# EAGLE board eTapper1main18 (EAGLE 8.2.2)
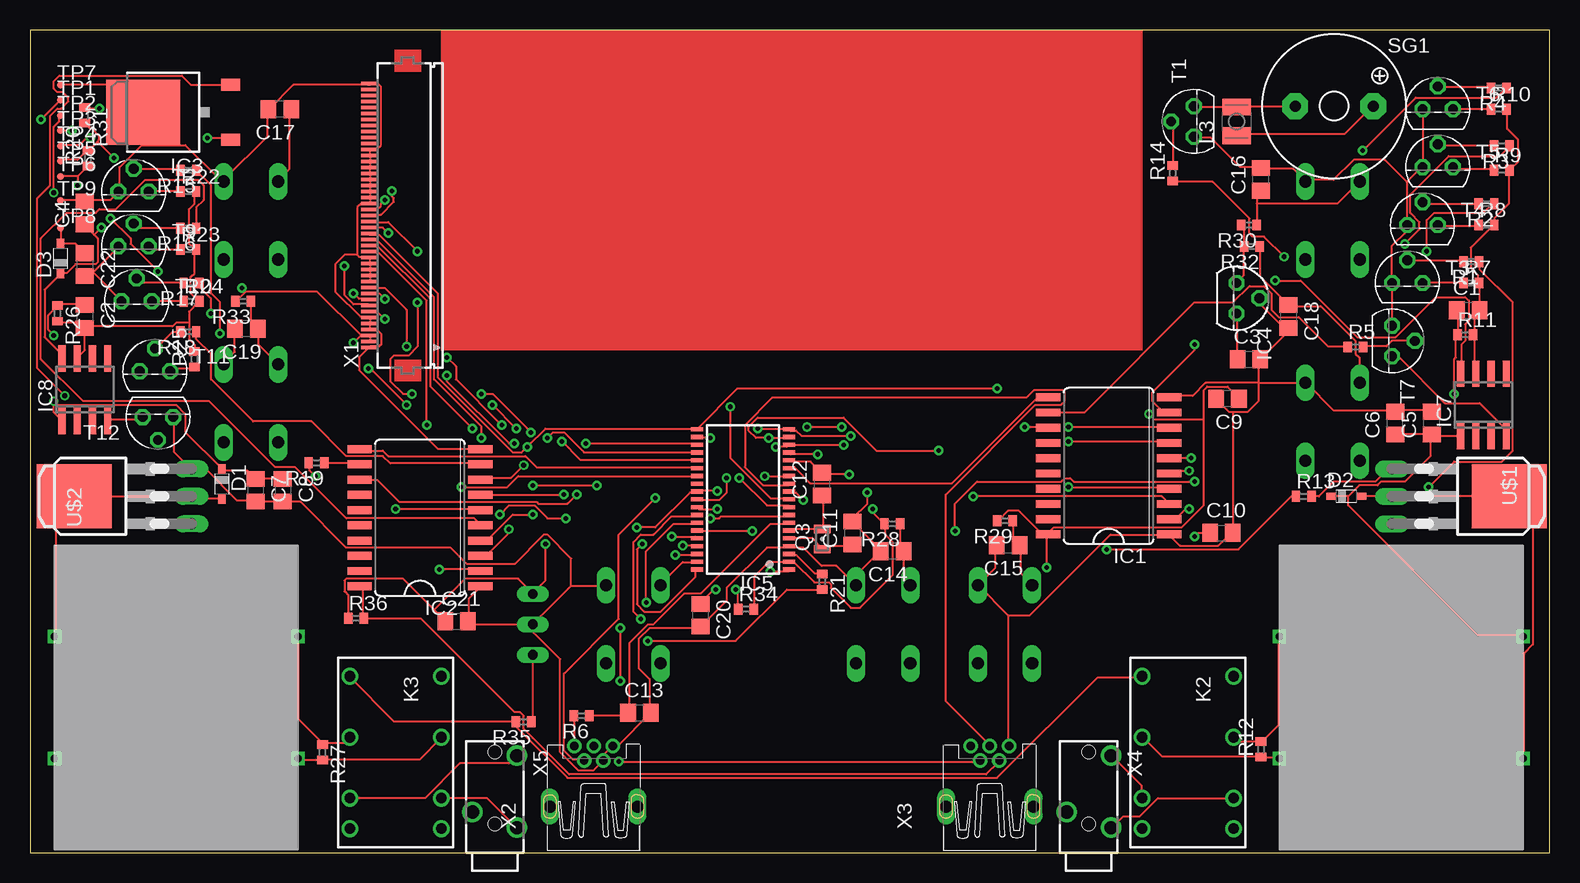
[diagram p0: board, top side]
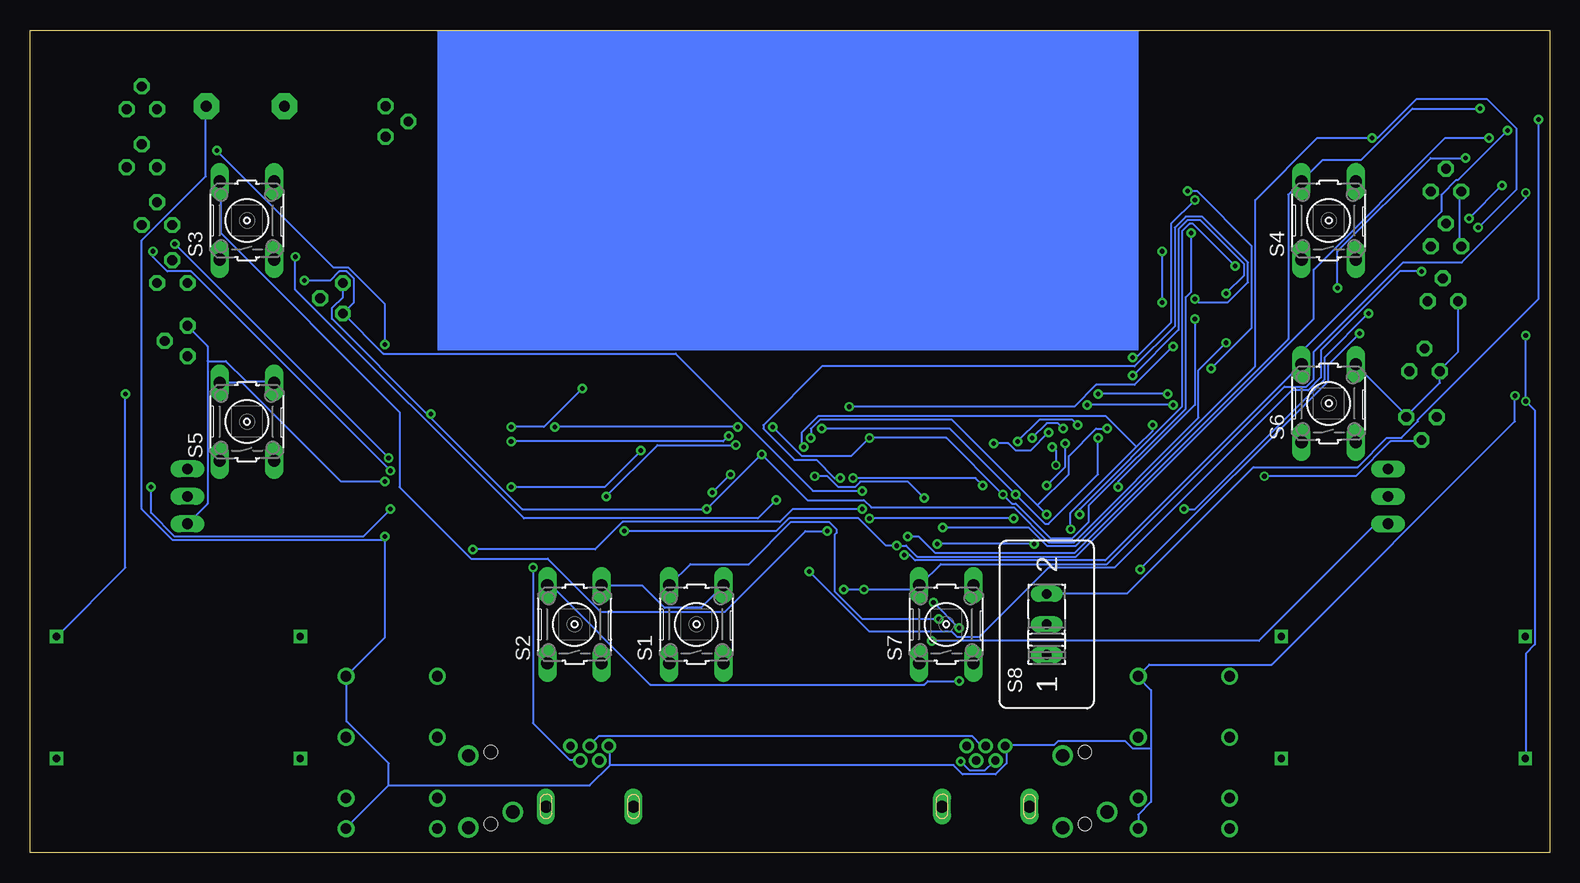
[diagram p1: board, bottom side, seen from below]

Size 126.67 x 68.57 mm. Coordinates in mm from the lower left corner, seen from the top.
Outline: 0,0 126.67,0 126.67,68.57 0,68.57 0,0
Copper layers (1*16): Top 0.035mm / dielectric 1.5mm / Bottom 0.035mm
Design rules "default *": minimum track width 6mil, minimum drill 15mil, track to track 6mil, track to pad 6mil, pad to pad 6mil, via to via 6mil, smd to smd 6mil, copper to edge 10mil, drill to drill 10mil, minimum pad ring 10mil, minimum via ring 8mil, stop-mask expansion 4mil, vias tented up to drill 0mil, thermal gap 15mil

## Footprints (pad centres in the part's own frame; a part is rotated, then mirrored left to right if it is on the bottom)
C0805 = smd 1.3 x 1.5: 1 -0.95,0; 2 0.95,0
SOD323_ST = smd 0.8 x 0.6: A 1.25,0; C -1.25,0
SO20W = smd 0.66 x 2.032: 1 -5.715,-5.029; 2 -4.445,-5.029; 3 -3.175,-5.029; 4 -1.905,-5.029; 5 -0.635,-5.029; 6 0.635,-5.029; 7 1.905,-5.029; 8 3.175,-5.029; 9 4.445,-5.029; 10 5.715,-5.029; 11 5.715,5.029; 12 4.445,5.029; 13 3.175,5.029; 14 1.905,5.029; 15 0.635,5.029; 16 -0.635,5.029; 17 -1.905,5.029; 18 -3.175,5.029; 19 -4.445,5.029; 20 -5.715,5.029
TO252 = smd 1 x 1.6: 1 -2.28,-4.8; 3 2.28,-4.8 | smd 5.4 x 6.2: 2 0,2.5
TO92 = drill 0.813 pad 1.27 octagon: 1 -1.27,0; 2 0,1.905; 3 1.27,0
TSSOP38_R-PDSO-G38-DA = smd 0.35 x 1: 1 -5.85,-3.85; 2 -5.2,-3.85; 3 -4.55,-3.85; 4 -3.9,-3.85; 5 -3.25,-3.85; 6 -2.6,-3.85; 7 -1.95,-3.85; 8 -1.3,-3.85; 9 -0.65,-3.85; 10 0,-3.85; 11 0.65,-3.85; 12 1.3,-3.85; 13 1.95,-3.85; 14 2.6,-3.85; 15 3.25,-3.85; 16 3.9,-3.85; 17 4.55,-3.85; 18 5.2,-3.85; 19 5.85,-3.85; 20 5.85,3.85; 21 5.2,3.85; 22 4.55,3.85; 23 3.9,3.85; 24 3.25,3.85; 25 2.6,3.85; 26 1.95,3.85; 27 1.3,3.85; 28 0.65,3.85; 29 0,3.85; 30 -0.65,3.85; 31 -1.3,3.85; 32 -1.95,3.85; 33 -2.6,3.85; 34 -3.25,3.85; 35 -3.9,3.85; 36 -4.55,3.85; 37 -5.2,3.85; 38 -5.85,3.85
SO08 = smd 0.6 x 2.2: 1 -1.905,-2.6; 2 -0.635,-2.6; 3 0.635,-2.6; 4 1.905,-2.6; 5 1.905,2.6; 6 0.635,2.6; 7 -0.635,2.6; 8 -1.905,2.6
DF2 = drill 0.9: 1 -6.35,-3.81; 3 -1.27,-3.81; 5 3.81,-3.81; 6 6.35,-3.81; 7 6.35,3.81; 8 3.81,3.81; 10 -1.27,3.81; 12 -6.35,3.81
L2825P = smd 1.4 x 2.4: 1 -1.2,0; 2 1.2,0
FC-12M = smd 0.7 x 1.4: 1 -0.85,0; 2 0.85,0
R0402 = smd 0.7 x 0.9: 1 -0.65,0; 2 0.65,0
B3F-10XX = drill 1.016 long: 1 -3.251,2.261; 2 3.251,2.261; 3 -3.251,-2.261; 4 3.251,-2.261
M251 = drill 0.813 long: 1 -2.54,0; 2 0,0; 3 2.54,0
F/QMBIII = drill 0.914 pad 2.159 octagon: + 3.251,0; - -3.251,0
TO92' = drill 0.813 octagon: 1 1.27,0; 2 0,1.905; 3 -1.27,0
TP06R = smd 0.6 x 0.6: TP 0,0
I-PAK_TO251AA = drill 0.889 long: 1 -2.286,-5.334; 2 0,-5.334; 3 2.286,-5.334 | smd 5.334 x 6.223: 4 0,4.445
XFMR = drill 0.6 square: P$1 -10.16,5.08; P$2 -10.16,-5.08; P$3 10.16,5.08; P$4 10.16,-5.08
FH12-45S-0.5SH = smd 0.3 x 1.3: 1 -13,3.25; 2 -12.5,3.25; 3 -12,3.25; 4 -11.5,3.25; 5 -11,3.25; 6 -10.5,3.25; 7 -10,3.25; 8 -9.5,3.25; 9 -9,3.25; 10 -8.5,3.25; 11 -8,3.25; 12 -7.5,3.25; 13 -7,3.25; 14 -6.5,3.25; 15 -6,3.25; 16 -5.5,3.25; 17 -5,3.25; 18 -4.5,3.25; 19 -4,3.25; 20 -3.5,3.25; 21 -3,3.25; 22 -2.5,3.25; 23 -2,3.25; 24 -1.5,3.25; 25 -1,3.25; 26 -0.5,3.25; 27 0,3.25; 28 0.5,3.25; 29 1,3.25; 30 1.5,3.25; 31 2,3.25; 32 2.5,3.25; 33 3,3.25; 34 3.5,3.25; 35 4,3.25; 36 4.5,3.25; 37 5,3.25; 38 5.5,3.25; 39 6,3.25; 40 6.5,3.25; 41 7,3.25; 42 7.5,3.25; 43 8,3.25; 44 8.5,3.25; 45 9,3.25
32005-601 = drill 0.7 pad 1.016: 1 2.825,1.6; 2 1.625,0.8; 3 2.825,0; 4 1.625,-0.8; 5 2.825,-1.6 | drill 1 pad 1.422 long: M1 -2.225,3.65; M2 -2.225,-3.65
1501_03 = drill 1.1 pad 1.7: 1 -1.85,0.3; 2 1.85,-1; 3 -1.85,-5.7 | hole 1.1: 0,0; 0,-6

## Placement (x,y rotation side)
C1  .01uF  [C0805]  119.89,45.21 0 top
C2  .01uF  [C0805]  4.57,44.7 270 top
C3  [C0805]  101.6,41.15 0 top
C4  [C0805]  4.57,53.34 90 top
C5  3.3uF  [C0805]  116.84,35.81 90 top
C6  220uF  [C0805]  113.79,35.81 90 top
C7  220uF  [C0805]  18.8,30.23 270 top
C8  3.3uF  [C0805]  21.08,30.23 270 top
C9  47uF  [C0805]  99.82,37.85 180 top
C10  47uF  [C0805]  99.31,26.67 0 top
C11  12pF  [C0805]  68.58,26.67 90 top
C12  12pF  [C0805]  66.04,30.73 90 top
C13  1 uF  [C0805]  50.8,11.68 0 top
C14  .1uF  [C0805]  71.88,25.15 180 top
C15  .1uF  [C0805]  81.53,25.65 180 top
C16  .1uF  [C0805]  102.62,56.13 90 top
C17  .1uF  [C0805]  20.83,61.98 180 top
C18  .1uF  [C0805]  104.9,44.7 270 top
C19  .1uF  [C0805]  18.03,43.69 180 top
C20  .1uF  [C0805]  55.88,19.81 270 top
C21  .1uF  [C0805]  35.56,19.3 0 top
C22  220uF  [C0805]  4.57,49.02 270 top
D1  BAT60J  [SOD323_ST]  16,30.73 270 top
D2  BAT60J  [SOD323_ST]  109.73,29.72 0 top
D3  BAT60J  [SOD323_ST]  2.54,49.53 90 top
IC1  74AC373DW  [SO20W]  89.92,32.26 90 top
IC2  74AC373DW  [SO20W]  32.51,27.94 90 top
IC3  LM2936DT-5.0  [TO252]  11.94,61.72 90 top
IC4  LM2936Z-3.0  [TO92]  100.58,46.23 270 top
IC5  MSP430F2232IDA  [TSSOP38_R-PDSO-G38-DA]  59.44,29.46 90 top
IC7  LP2951M  [SO08]  121.16,37.34 0 top
IC8  LP2951M  [SO08]  4.57,38.61 0 top
K2  DF2-DC3V  [DF2]  96.52,8.38 270 top
K3  DF2-DC3V  [DF2]  30.48,8.38 270 top
L3  470uH  [L2825P]  100.58,60.96 90 top
Q3  FC-12M  [FC-12M]  66.04,26.16 90 top
R1  47K  [R0402]  120.14,49.28 180 top
R2  47K  [R0402]  121.41,54.1 180 top
R3  47K  [R0402]  122.68,58.93 180 top
R4  [R0402]  122.43,63.75 180 top
R5  47K  [R0402]  110.49,42.16 0 top
R6  47K  [R0402]  45.97,11.43 180 top
R7  1K  [R0402]  120.14,47.5 0 top
R8  3K  [R0402]  121.41,52.32 0 top
R9  6K  [R0402]  122.68,56.9 0 top
R10  12K  [R0402]  122.43,61.98 0 top
R11  3K  [R0402]  119.63,43.18 0 top
R12  51K  [R0402]  102.62,8.64 90 top
R13  1K  [R0402]  106.17,29.72 0 top
R14  1K  [R0402]  95.25,56.64 90 top
R15  47K  [R0402]  13.21,56.9 180 top
R16  47K  [R0402]  13.21,52.07 180 top
R17  47K  [R0402]  13.46,47.5 180 top
R18  47K  [R0402]  13.21,43.43 180 top
R19  47K  [R0402]  23.88,32.51 180 top
R20  47K  [R0402]  4.83,57.91 90 top
R21  1K  [R0402]  66.04,22.61 270 top
R22  1K  [R0402]  13.21,55.12 0 top
R23  3K  [R0402]  13.21,50.29 0 top
R24  6K  [R0402]  13.46,45.97 0 top
R25  12K  [R0402]  13.72,41.15 90 top
R26  3K  [R0402]  2.29,44.96 270 top
R27  51K  [R0402]  24.38,8.38 270 top
R28  47K  [R0402]  71.88,27.43 180 top
R29  47K  [R0402]  81.28,27.69 180 top
R30  47K  [R0402]  101.6,52.32 180 top
R31  47K  [R0402]  4.57,61.47 270 top
R32  47K  [R0402]  101.85,50.55 180 top
R33  47K  [R0402]  17.78,45.97 180 top
R34  47K  [R0402]  59.69,20.32 0 top
R35  100  [R0402]  41.15,10.92 180 top
R36  47K  [R0402]  27.18,19.56 0 top
S1  [B3F-10XX]  71.12,19.05 90 bottom
S2  [B3F-10XX]  81.28,19.05 90 bottom
S3  [B3F-10XX]  108.58,52.7 90 bottom
S4  [B3F-10XX]  18.41,52.7 90 bottom
S5  [B3F-10XX]  108.58,35.94 90 bottom
S6  [B3F-10XX]  18.41,37.47 90 bottom
S7  [B3F-10XX]  50.29,19.05 90 bottom
S8  [M251]  41.91,19.05 90 bottom
SG1  F/QMBIII  [F/QMBIII]  108.71,62.23 0 top
T1  2N3904  [TO92']  97.03,60.96 90 top
T2  2N3904  [TO92']  8.64,55.12 0 top
T3  2N3904  [TO92']  114.81,47.5 0 top
T4  2N3904  [TO92']  116.08,52.32 0 top
T5  2N3904  [TO92']  117.35,57.15 0 top
T6  2N3904  [TO92']  117.35,61.98 0 top
T7  2N3904  [TO92']  113.54,42.67 270 top
T9  2N3904  [TO92']  8.64,50.55 0 top
T10  2N3904  [TO92']  8.89,45.97 0 top
T11  2N3904  [TO92']  10.41,40.13 0 top
T12  2N3904  [TO92']  10.67,36.32 180 top
TP1  TPSTP06R  [TP06R]  2.54,62.74 0 top
TP2  TPSTP06R  [TP06R]  2.54,61.47 0 top
TP3  TPSTP06R  [TP06R]  2.54,60.2 0 top
TP4  TPSTP06R  [TP06R]  2.54,58.93 0 top
TP5  TPSTP06R  [TP06R]  2.54,57.66 0 top
TP6  TPSTP06R  [TP06R]  2.54,56.39 0 top
TP7  TPSTP06R  [TP06R]  2.54,64.01 0 top
TP8  TPSTP06R  [TP06R]  2.54,52.07 0 top
TP9  TPSTP06R  [TP06R]  2.54,54.36 0 top
U$1  IRLR024N  [I-PAK_TO251AA]  118.87,29.72 270 top
U$2  IRLR024N  [I-PAK_TO251AA]  8.13,29.72 90 top
U$3  XFMR  [XFMR]  114.3,12.95 180 top
U$4  XFMR  [XFMR]  12.19,12.95 0 top
X1  FH12-45S-0.5SH  [FH12-45S-0.5SH]  31.5,55.12 90 top
X2  MINI-USB_SHIELD5P2-32005-601  [32005-601]  46.99,6.1 90 top
X3  MINI-USB_SHIELD5P2-32005-601  [32005-601]  80.01,6.1 90 top
X4  1501_03  [1501_03]  88.27,2.41 180 top
X5  1501_03  [1501_03]  38.73,2.41 180 top

## Library data of the parts
C1-C22 L3 = rcl
D1-D3 = diode
IC1 IC2 = 74xx-eu
IC3 = national-semiconductor; MF: NATIONAL SEMICONDUCTOR; MPN: LM2936DT-5.0/NOPB; OC_FARNELL: 1286864; OC_NEWARK: 41K4501
IC4 = national-semiconductor; MF: NATIONAL SEMICONDUCTOR; MPN: LM2936Z-3.0/NOPB; OC_FARNELL: 1312709; OC_NEWARK: 41K4531
IC5 = texas; MPN: MSP430F2232IDA; OC_FARNELL: 1610178; OC_NEWARK: 28M6312
IC7 IC8 = national-semiconductor; MF: FAIRCHILD SEMICONDUCTOR; MPN: LP2951CM; OC_FARNELL: 9488561; OC_NEWARK: 78K6014
K2 K3 = relay; OC_FARNELL: unknown; OC_NEWARK: unknown
Q3 = crystal
R1-R36 = resistor
S1-S7 = switch-omron; MPN: B3F-1000; OC_FARNELL: 176432; OC_NEWARK: 36M3542
S8 = switch
SG1 = buzzer; OC_FARNELL: unknown; OC_NEWARK: unknown
T1-T7 T9-T12 = transistor-neu-to92
TP1-TP9 = testpad
U$1 U$2 = IRLR024N
U$3 U$4 = XFMR
X1 = con-hirose; OC_FARNELL: unknown; OC_NEWARK: unknown
X2 X3 = con-cypressindustries; OC_FARNELL: unknown; OC_NEWARK: unknown
X4 X5 = con-lumberg; OC_FARNELL: 1200127; OC_NEWARK: unknown

## Nets
+3V: C9.1 IC1.20 IC2.20 IC4.1 IC5.2 IC5.16 R20.2 R28.2 R29.2 R30.2 R31.2 R32.2 R33.2 R34.2 R36.2 TP5.TP X1.2 X1.3 X3.4
+9V: C3.1 C4.1 D3.C IC3.1 IC4.3 IC5.28 IC7.8 IC8.8
/LCS: IC5.8 X1.8
/RST: C13.1 IC5.7 R6.1
BAT+: C22.1 D3.A TP8.TP
GND: C3.2 C4.2 C5.2 C6.2 C7.2 C8.2 C9.2 C10.2 C11.2 C12.2 C13.2 C14.2 C15.2 C16.2 C17.2 C18.2 C19.2 C20.2 C21.2 C22.2 IC1.1 IC1.10 IC2.1 IC2.10 IC3.2 IC4.2 IC5.4 IC5.15 S1.4 S2.4 S3.4 S4.4 S5.4 S6.4 S7.4 S8.2 T1.3 T2.3 T3.3 T4.3 T5.3 T6.3 T7.3 T9.3 T10.3 T11.3 T12.3 TP7.TP TP9.TP U$1.3 U$2.3 X1.1 X1.4 X1.5 X1.6 X1.12 X1.13 X1.14 X1.15 X1.16 X1.25 X1.26 X1.27 X1.28 X1.29 X1.30 X1.31 X1.32 X1.33 X1.34 X1.45 X2.4 X2.5 X3.5
IO1_0: C14.1 IC5.31 R28.1 S1.2
IO1_1: C15.1 IC5.32 R29.1 S2.2
IO1_2: C16.1 IC5.33 R30.1 S3.2
IO1_3: C17.1 IC5.34 R31.1 S4.2
IO4_0: IC1.3 IC2.3 IC5.17 X1.17
IO4_1: IC1.4 IC2.4 IC5.18 X1.18
IO4_2: IC1.7 IC2.7 IC5.19 X1.19
IO4_3: IC1.8 IC2.8 IC5.20 X1.20
IO4_4: IC1.13 IC2.13 IC5.21 X1.21
IO4_5: IC5.22 X1.22
IO4_6: IC5.23 X1.23
IO4_7: IC5.24 X1.24
J2_1: K2.3 R12.1 U$3.P$3
J2_3: K2.10 R12.2 U$3.P$4
J3_1: K3.3 R27.1 U$4.P$3
J3_3: K3.10 R27.2 U$4.P$4
LD_/C: IC5.29 X1.9
LEDA: X1.36
LEDK1: X1.37
LEDK2: X1.38
LEDK3: X1.39
LEDK4: X1.40
LHVTRIG: IC5.30 R13.1
LNC1: X1.41
LNC2: X1.42
LNC3: X1.43
LNC4: X1.44
LRD: IC5.10 X1.11
LRESET: IC5.26 X1.7
LSDO: X1.35
LTS+: K2.8 X4.1
LTS-: K2.5 X4.3
LVSEL: IC1.11 IC5.14
LWR: IC5.9 X1.10
N$1: IC1.2 R1.1
N$2: IC1.5 R2.1
N$3: IC1.6 R3.1
N$4: IC1.9 R4.1
N$5: IC1.12 R5.1
N$6: L3.2 SG1.- T1.1
N$7: R4.2 T6.2
N$8: R5.2 T7.2
N$9: D2.A U$1.2 U$1.4 U$3.P$1
N$10: R7.1 T3.1
N$11: R8.1 T4.1
N$12: R9.1 T5.1
N$13: R1.2 T3.2
N$14: R2.2 T4.2
N$15: R3.2 T5.2
N$16: R10.1 T6.1
N$17: C1.2 IC7.7 R7.2 R8.2 R9.2 R10.2 R11.2
N$18: C1.1 C5.1 C6.1 D2.C IC7.1 R11.1 U$3.P$2
N$19: D1.A U$2.2 U$2.4 U$4.P$1
N$20: IC2.2 R15.1
N$21: R13.2 U$1.1
N$22: R14.2 T1.2
N$23: R35.1 S8.1
N$24: IC2.5 R16.1
N$25: IC2.6 R17.1
N$26: IC2.9 R18.1
N$27: IC2.12 R19.1
N$29: R15.2 T2.2
N$30: R16.2 T9.2
N$31: R17.2 T10.2
N$32: R18.2 T11.2
N$33: R19.2 T12.2
N$34: K2.1 K3.1 R35.2
N$35: R22.1 T2.1
N$36: R23.1 T9.1
N$37: R24.1 T10.1
N$38: R25.1 T11.1
N$39: C2.2 IC8.7 R22.2 R23.2 R24.2 R25.2 R26.2
N$40: C2.1 C7.1 C8.1 D1.C IC8.1 R26.1 U$4.P$2
N$42: R21.2 U$2.1
N$45: IC7.4 T7.1
N$47: IC8.4 T12.1
RHVTRIG: IC5.3 R21.1
RTS+: K3.8 X5.1
RTS-: K3.5 X5.3
RVSEL: IC2.11 IC5.25
SCL: IC5.13 X2.2 X3.2
SDA: IC5.12 X2.3 X3.3
SPKR: IC5.11 R14.1
TCK: C18.1 IC5.35 R32.1 S5.2 TP4.TP
TDI: C20.1 IC5.37 R34.1 S7.2 TP2.TP
TDO: C21.1 IC5.38 R36.1 S8.3 TP1.TP
TEST: IC5.1 R20.1 TP6.TP
TMS: C19.1 IC5.36 R33.1 S6.2 TP3.TP
VCC: C10.1 IC3.3 K2.7 K2.12 K3.7 K3.12 L3.1 R6.2 SG1.+ X2.1 X3.1
XIN: C12.1 IC5.6 Q3.2
XOUT: C11.1 IC5.5 Q3.1

## Tracks (layer width: path | path; a pad name or v marks a point on that pad's centre or on a via)
+3V  (via drill 0.38)
  Top 0.152: TP5.TP 2.59,57.76 3.96,57.76 4.72,58.52 R20.2 4.88,58.52 5.64,59.28 | 5.64,59.28 5.79,59.44 5.79,59.74 5.18,60.35 5.03,60.35 4.57,60.81 R31.2 | 17.98,46.79 17.22,46.02 R33.2 | 17.98,46.79 23.93,46.79 27.58,43.13 | 27.58,43.13 28.19,43.13 X1.3 28.35,42.98 28.35,42.67 X1.2 | v7.01,57.91 5.64,59.28 | 17.98,46.79 v17.68,47.09 | R34.2 60.35,20.42 60.35,23.01 61.57,24.23 63.25,24.23 IC5.2 63.4,24.23 63.7,24.23 65.38,22.55 66.6,22.55 66.75,22.4 66.75,22.1 68.43,20.42 69.19,20.42 71.93,23.16 71.93,25.91 71.32,26.52 71.32,27.43 R28.2 71.17,27.43 70.26,28.35 v70.26,28.65 | v65.68,33.22 63.4,33.22 IC5.16 | R30.2 101.04,52.27 101.19,52.12 101.19,50.6 R32.2 101.19,50.44 101.19,48.16 100.58,47.55 IC4.1 | IC2.20 27.58,22.1 27.74,21.95 27.74,19.66 R36.2 27.89,19.51 32.61,19.51 40.39,11.73 40.84,11.73 41.15,11.43 41.15,10.36 44.96,6.55 79.7,6.55 80.77,7.62 X3.4 | 84.89,26.67 84.73,26.67 | 84.73,26.67 84.28,26.67 82.45,28.5 81.53,28.5 80.77,27.74 R29.2 | 97.84,36.12 97.84,28.96 96.01,27.13 85.34,27.13 84.89,26.67 | 97.84,36.12 97.84,38.56 98.15,38.86 99.82,38.86 100.74,37.95 C9.1 | 84.89,26.67 IC1.20 84.73,26.67 | 84.73,26.67 v84.73,23.77 | v93.27,36.58 93.73,36.12 97.84,36.12 | v26.98,42.52 27.58,43.13
  Bottom 0.152: v7.01,57.91 9.91,57.91 17.68,50.14 v17.68,47.09 | v84.73,23.77 84.73,10.82 81.69,7.77 80.92,7.77 X3.4 | IC4.1 100.58,46.33 101.5,45.41 101.5,44.5 93.57,36.58 | 93.57,36.58 85.65,28.65 v70.26,28.65 v65.68,33.22 61.87,29.41 57.15,29.41 56.54,28.8 44.65,28.8 41.76,25.91 39.62,25.91 29.26,36.27 29.26,40.23 v26.98,42.52 | 93.57,36.58 v93.27,36.58
+9V  (via drill 0.38)
  Top 0.152: 5.33,51.51 4.57,52.27 C4.1 | 5.33,51.51 5.64,51.21 5.64,49.23 5.49,49.07 3.81,49.07 3.05,48.31 2.59,48.31 D3.C 2.44,48.16 1.22,46.94 1.22,42.98 2.59,41.6 2.59,41.3 IC8.8 | v14.78,59.59 16.61,59.59 IC3.1 | 5.33,51.51 v5.94,52.12 | v57.3,30.18 55.63,30.18 IC5.28 55.47,30.02 55.02,30.02 52.12,27.13 v50.6,27.13 | IC4.3 100.58,41.15 C3.1 | v103.78,47.7 105.92,47.7 110.64,42.98 113.84,42.98 117.2,46.33 119.63,46.33 119.94,46.02 119.94,44.35 119.63,44.04 119.63,42.67 119.33,42.37 119.33,40.08 IC7.8
  Bottom 0.152: v5.94,52.12 2.74,55.32 2.74,60.35 5.18,62.79 11.12,62.79 14.33,59.59 v14.78,59.59 19.36,59.59 24.54,54.41 24.54,40.54 39.47,25.6 41.91,25.6 43.43,27.13 v50.6,27.13 | v57.3,30.18 61.42,30.18 72.85,41.6 97.23,41.6 IC4.3 99.67,45.87 99.67,47.85 100.28,48.46 100.89,48.46 101.65,47.7 v103.78,47.7
/LCS  (via drill 0.38)
  Top 0.152: v56.69,27.89 57.45,27.89 57.61,28.04 63.25,28.04 IC5.8 | v44.65,27.89 43.13,27.89 42.06,28.96 39.93,28.96 v39.17,28.19 | v26.21,48.92 26.21,46.48 26.98,45.72 28.19,45.72 X1.8
  Bottom 0.152: v44.65,27.89 v56.69,27.89 | v39.17,28.19 39.17,28.65 30.63,37.19 30.63,51.82 30.02,52.43 29.72,52.43 v26.21,48.92
/RST
  Top 0.152: R6.1 49.68,11.43 49.84,11.58 C13.1 49.99,11.73 49.99,17.53 51.51,19.05 51.97,19.05 54.56,21.64 55.93,21.64 61.72,27.43 63.25,27.43 IC5.7
BAT+
  Top 0.152: TP8.TP 2.59,51.97 2.59,50.9 D3.A 2.59,50.75 3.81,50.75 4.57,49.99 C22.1
GND  (via drill 0.38)
  Top 0.152: IC2.10 37.49,33.68 33.98,33.68 27.43,40.23 27.43,41.3 28.19,42.06 X1.1 28.35,42.22 29.11,42.22 29.26,42.37 29.26,43.28 28.96,43.59 28.35,43.59 X1.4 28.35,43.74 28.35,44.04 X1.5 28.35,44.2 28.35,44.5 X1.6 28.19,44.65 27.58,44.65 25.45,46.79 25.45,49.07 26.21,49.84 27.28,49.84 | 16.15,56.08 19.81,59.74 19.81,61.87 C17.2 19.96,62.03 21.95,64.01 28.19,64.01 X1.45 28.35,64.01 29.11,64.01 29.26,63.86 29.26,58.98 28.96,58.67 28.35,58.67 X1.34 28.35,58.52 28.35,58.22 X1.33 28.35,58.06 28.35,57.76 X1.32 28.35,57.61 28.35,57.15 X1.31 28.35,57 28.35,56.69 X1.30 28.35,56.54 28.35,56.24 X1.29 28.35,56.08 28.35,55.63 X1.28 28.35,55.47 28.35,55.17 X1.27 28.35,55.02 28.35,54.71 X1.26 28.35,54.56 28.35,54.25 X1.25 28.19,54.1 27.58,54.1 27.28,53.8 27.28,49.84 | X1.12 28.35,47.7 28.35,48.01 X1.13 28.35,48.16 28.35,48.62 | 28.35,48.62 28.35,49.07 X1.15 28.35,49.23 28.35,49.53 X1.16 28.19,49.68 27.43,49.68 27.28,49.84 | 28.35,48.62 X1.14 | TP7.TP 7.01,64.01 9.3,61.72 | 4.57,54.41 2.59,54.41 TP9.TP | 4.57,54.41 6.71,54.41 7.32,55.02 T2.3 7.47,55.17 7.47,57.15 9.3,58.98 | 4.57,54.41 C4.2 | 5.18,48.31 7.32,50.44 T9.3 | 5.18,48.31 5.03,48.16 4.57,48.16 C22.2 5.18,48.31 | 5.18,48.31 5.33,48.31 7.62,46.02 T10.3 | C19.2 17.07,43.59 17.07,41.76 16.15,40.84 S6.4 | T12.3 12.04,36.27 12.04,33.38 13.41,32 U$2.3 14.63,32 17.22,29.41 18.75,29.41 C7.2 18.9,29.26 21.03,29.26 C8.2 21.18,29.26 22.55,29.26 26.36,25.45 35.05,25.45 36.42,24.08 40.39,24.08 42.82,26.52 43.13,26.52 45.11,24.54 45.11,22.25 | 9.3,58.98 9.3,61.72 | 9.3,61.72 IC3.2 | 16.15,56.08 15.85,56.08 12.95,58.98 9.3,58.98
  Top 0.152: 16.15,56.08 S4.4 | C5.2 116.74,36.88 113.84,36.88 C6.2 113.69,36.88 108.66,36.88 106.38,39.17 S5.4 106.22,39.17 102.41,39.17 | 94.94,26.52 95.86,25.6 99.06,25.6 100.13,26.67 C10.2 100.28,26.67 100.28,36.73 | 100.28,36.73 101.5,36.73 102.41,37.64 102.41,39.17 | 100.28,36.73 99.97,36.73 98.91,37.8 C9.2 | 102.41,39.17 102.41,41.15 C3.2 102.56,41.15 104.85,43.43 104.85,43.74 C18.2 104.85,43.89 104.39,43.89 102.56,45.72 102.56,46.18 IC4.2 | 102.41,39.17 97.99,39.17 96.93,38.1 94.94,38.1 IC1.10 | T1.3 97.08,59.59 98.45,59.59 100.89,57.15 102.56,57.15 C16.2 102.72,57 105.31,57 106.22,56.08 S3.4 106.38,56.08 108.66,56.08 110.34,57.76 112.93,57.76 114.76,55.93 | 114.76,55.93 114.76,52.43 T4.3 114.76,52.27 114.76,51.82 113.54,50.6 T3.3 T7.3 | 114.76,55.93 115.98,57.15 T5.3 116.13,57.15 116.13,61.87 T6.3 | C15.2 80.47,25.6 80.47,23.77 79.1,22.4 S2.4 79.1,22.25 81.53,19.81 | 81.53,19.81 81.53,8.99 X3.5 | IC2.1 37.49,22.1 36.58,21.18 36.58,19.36 C21.2 36.58,19.2 36.73,19.05 S8.2 | 45.11,22.25 48.01,22.25 S7.4 | S8.2 45.11,22.25 | IC5.15 63.4,32.61 65.08,32.61 65.99,31.7 C12.2 66.14,31.55 v68.28,31.55 | 68.43,22.71 68.73,22.4 S1.4 68.43,22.71 | 68.43,22.71 67.21,23.93 65.99,23.93 64.47,25.45 63.4,25.45 IC5.4 63.25,25.45 61.42,25.45 58.06,22.1 58.06,21.03 55.93,18.9 C20.2 55.78,18.75 51.66,18.75 50.75,17.83 50.75,15.39 51.66,14.48 51.66,11.73 C13.2 51.66,11.58 49.07,8.99 48.62,8.99 X2.5 48.46,8.84 47.85,8.23 47.85,7.77 X2.4 47.7,7.62 46.94,6.86 45.72,6.86 44.2,8.38 44.2,16.15 41.91,18.44 S8.2 | 68.43,22.71 70.87,25.15 C14.2 71.02,25.15 68.58,27.58 C11.2 68.58,27.89 69.8,29.11 v69.8,30.02
  Top 0.152: 94.94,26.52 90.07,26.52 83.36,19.81 81.53,19.81 | 94.94,26.52 IC1.1
  Bottom 0.152: T2.3 7.47,55.02 7.47,50.6 T9.3 | 11.89,36.42 9.14,39.17 T11.3 9.14,40.23 7.62,41.76 T10.3 | 11.89,36.42 16.15,40.69 S6.4 | 11.89,36.42 T12.3 | U$1.3 111.86,29.11 111.86,41 | 111.86,41 111.86,42.22 113.54,43.89 T7.3 | 111.86,41 110.34,41 108.66,39.32 106.38,39.32 S5.4 | v69.8,30.02 v68.28,31.55 | S2.4 78.94,22.25 75.59,22.25 73.76,20.42 70.71,20.42 68.89,22.25 S1.4
IO1_0  (via drill 0.38)
  Top 0.152: R28.1 72.54,27.43 72.54,25.3 72.69,25.15 C14.1 72.85,25.15 72.85,22.86 73.3,22.4 S1.2 | v50.9,19.51 50.29,20.12 50.29,25.91 50.9,26.52 51.97,26.52 53.49,28.04 55.47,28.04 IC5.31
  Bottom 0.152: v50.9,19.51 57.3,19.51 59.59,21.79 59.59,26.52 59.44,26.67 59.44,26.98 60.05,27.58 63.25,27.58 66.75,24.08 71.63,24.08 73.3,22.4 S1.2
IO1_1  (via drill 0.38)
  Top 0.152: R29.1 81.99,27.58 81.99,26.21 82.45,25.76 C15.1 82.6,25.6 82.6,23.32 83.52,22.4 S2.2 | v51.36,20.88 51.36,25.15 53.65,27.43 55.47,27.43 IC5.32 | v49.23,14.33 v49.23,18.75
  Bottom 0.152: v49.23,18.75 v51.36,20.88 | v49.23,14.33 51.82,14.33 52.12,14.02 74.98,14.02 83.21,22.25 83.52,22.25 S2.2
IO1_2  (via drill 0.38)
  Top 0.152: 102.26,54.1 102.26,54.86 102.56,55.17 C16.1 | 102.26,54.1 102.26,52.43 R30.1 | v60.2,26.82 55.63,26.82 IC5.33 | 102.26,54.1 108.97,54.1 110.8,55.93 S3.2
  Bottom 0.152: v60.2,26.82 62.03,26.82 68.73,20.12 79.1,20.12 83.52,24.54 89.92,24.54 95.86,30.48 95.86,36.73 110.8,51.66 110.8,55.93 S3.2
IO1_3  (via drill 0.38)
  Top 0.152: v5.79,62.03 4.57,62.03 R31.1 | v53.49,26.36 55.47,26.36 IC5.34 | C17.1 21.64,61.87 21.64,57 20.73,56.08 S4.2
  Bottom 0.152: v5.79,62.03 11.43,62.03 15.7,57.76 18.9,57.76 20.57,56.08 S4.2 20.73,55.93 21.79,54.86 21.79,42.82 39.62,24.99 51.21,24.99 52.58,26.36 v53.49,26.36
IO4_0  (via drill 0.38)
  Top 0.152: v33.07,35.66 33.07,46.02 28.96,50.14 28.35,50.14 X1.17 | v39.93,26.98 39.93,26.67 38.1,24.84 37.64,24.84 IC2.3 | v67.82,33.98 63.4,33.98 IC5.17 63.25,33.98 63.09,33.83 v62.18,33.83 | v78.64,29.72 94.34,29.72 94.94,29.11 IC1.3
  Bottom 0.152: v33.07,35.66 33.07,35.2 34.44,33.83 | 34.44,33.83 39.93,28.35 v39.93,26.98 | v67.82,33.98 74.37,33.98 v78.64,29.72 | 34.44,33.83 37.03,36.42 60.96,36.42 62.33,35.05 62.33,33.98 v62.18,33.83
IO4_1  (via drill 0.38)
  Top 0.152: v41.91,28.19 40.23,28.19 38.1,26.06 37.64,26.06 IC2.4 | IC5.18 63.25,34.59 v61.57,34.59 60.5,34.59 59.89,35.2 59.89,35.51 60.66,36.27 67.82,36.27 70.56,33.53 v75.74,33.53 | v36.88,35.36 33.38,38.86 33.38,46.18 28.96,50.6 28.35,50.6 X1.18 | v86.56,30.48 94.94,30.48 IC1.4
  Bottom 0.152: v61.57,34.59 61.57,35.36 60.81,36.12 49.84,36.12 42.67,28.96 | v41.91,28.19 42.67,28.96 | v36.88,35.36 37.8,35.36 40.08,33.07 40.08,31.55 42.67,28.96 | v86.56,30.48 78.79,30.48 v75.74,33.53
IO4_2  (via drill 0.38)
  Top 0.152: v60.66,35.36 63.25,35.36 IC5.19 63.4,35.2 63.86,35.2 64.31,34.75 v68.43,34.75 | v44.5,29.87 37.64,29.87 IC2.7 | v37.64,34.59 37.64,35.51 33.68,39.47 33.68,46.33 28.96,51.05 28.35,51.05 X1.19 | v86.56,34.29 94.94,34.29 IC1.7
  Bottom 0.152: v60.66,35.36 49.99,35.36 v44.5,29.87 42.06,27.43 41.76,27.43 37.64,31.55 v37.64,34.59 | v86.56,34.29 68.89,34.29 v68.43,34.75
IO4_3  (via drill 0.38)
  Top 0.152: X1.20 28.35,51.51 29.11,51.51 33.98,46.63 33.98,39.62 40.23,33.38 41,33.38 v41.45,33.83 42.98,35.36 55.47,35.36 IC5.20 55.63,35.36 58.98,38.71 v80.62,38.71 | v41.15,32.31 40.08,31.24 37.64,31.24 IC2.8 | v86.56,35.51 94.94,35.51 IC1.8
  Bottom 0.152: v41.15,32.31 41.15,33.53 v41.45,33.83 | v86.56,35.51 83.82,35.51 v80.62,38.71
IO4_4  (via drill 0.38)
  Top 0.152: v56.69,34.59 55.63,34.59 IC5.21 | v45.57,29.87 44.81,29.11 42.37,29.11 42.22,29.26 30.79,29.26 28.96,31.09 27.58,31.09 IC2.13 | v29.87,51.66 29.41,52.12 28.35,52.12 X1.21 | v82.91,35.51 84.89,35.51 IC1.13 | v64.77,35.51 v67.67,35.51
  Bottom 0.152: v29.87,51.66 29.87,46.79 30.33,46.33 30.33,37.03 38.41,28.96 38.41,27.58 39.78,26.21 41.6,26.21 44.5,29.11 44.81,29.11 v45.57,29.87 50.29,34.59 v56.69,34.59 58.22,33.07 62.33,33.07 v64.77,35.51 | v67.67,35.51 v82.91,35.51
IO4_5  (via drill 0.38)
  Top 0.152: v46.33,34.14 55.47,34.14 IC5.22 | v41.76,35.05 38.56,38.25 v37.64,38.25 | v31.85,38.25 31.09,38.25 30.02,39.32 30.02,41.15 30.33,41.45 31.55,41.45 32.31,42.22 v32.31,45.87 | v32.31,50.14 29.87,52.58 28.35,52.58 X1.22
  Bottom 0.152: v46.33,34.14 45.11,34.14 44.5,33.53 43.28,33.53 v41.76,35.05 | v31.85,38.25 v37.64,38.25 | v32.31,50.14 v32.31,45.87
IO4_6  (via drill 0.38)
  Top 0.152: v43.13,34.59 43.59,35.05 44.5,35.05 46.18,33.38 55.47,33.38 IC5.23 | v38.56,37.34 v40.54,35.36 | v31.39,37.34 28.35,40.39 v28.19,40.39 | v30.18,55.17 30.18,54.71 30.33,54.56 30.33,54.25 29.26,53.19 28.35,53.19 X1.23
  Bottom 0.152: v43.13,34.59 41.91,35.81 41,35.81 v40.54,35.36 | v31.39,37.34 v38.56,37.34 | v28.19,40.39 24.84,43.74 24.84,50.6 29.41,55.17 v30.18,55.17
IO4_7  (via drill 0.38)
  Top 0.152: v44.35,34.29 45.87,32.77 55.47,32.77 IC5.24 | v39.32,35.66 35.51,39.47 35.51,40.54 v34.75,41.3 | v29.57,54.41 29.26,54.1 29.26,53.95 28.96,53.65 28.35,53.65 X1.24
  Bottom 0.152: v44.35,34.29 42.52,36.12 39.78,36.12 v39.32,35.66 | v34.75,41.3 34.44,41.3 31.55,44.2 31.55,52.43 v29.57,54.41
J2_1
  Top 0.152: U$3.P$3 104.09,7.92 102.72,7.92 R12.1 102.56,8.08 94.34,8.08 92.81,9.6 K2.3
J2_3
  Top 0.152: K2.10 100.43,9.6 100.74,9.3 102.56,9.3 R12.2 102.72,9.3 104.09,10.67 104.09,17.98 U$3.P$4
J3_1
  Top 0.152: 24.38,9.14 26.21,9.14 26.67,9.6 K3.3 | 24.38,9.14 22.4,11.12 22.4,17.98 U$4.P$3 | 24.38,9.14 R27.1
J3_3
  Top 0.152: 24.38,7.77 22.4,7.77 U$4.P$4 | 24.38,7.77 32.46,7.77 34.29,9.6 K3.10 | 24.38,7.77 R27.2
LD_/C  (via drill 0.38)
  Top 0.152: v58.06,31.24 58.06,30.02 57.45,29.41 55.63,29.41 IC5.29 | v41.91,30.63 v47.24,30.63 | v40.39,34.14 39.93,34.14 34.75,39.32 v34.75,39.78 | v26.98,46.63 27.43,46.18 28.19,46.18 X1.9
  Bottom 0.152: v58.06,31.24 47.85,31.24 v47.24,30.63 | v41.91,30.63 40.39,32.16 v40.39,34.14 | v34.75,39.78 30.94,43.59 30.94,51.97 30.18,52.73 29.11,52.73 25.45,49.07 25.45,48.16 v26.98,46.63
LHVTRIG  (via drill 0.38)
  Top 0.152: R13.1 105.16,29.72 100.74,25.3 v89.76,25.3 | v57.3,28.65 55.78,28.65 55.63,28.8 IC5.30
  Bottom 0.152: v89.76,25.3 79.55,25.3 77.27,27.58 64.16,27.58 63.09,28.65 v57.3,28.65
LRD  (via drill 0.38)
  Top 0.152: v58.37,37.19 58.37,32.92 61.72,29.57 63.25,29.57 IC5.10 | v31.39,42.22 31.39,45.26 29.57,47.09 28.35,47.09 X1.11
  Bottom 0.152: v58.37,37.19 39.62,37.19 37.8,39.01 34.59,39.01 v31.39,42.22
LRESET  (via drill 0.38)
  Top 0.152: v35.97,30.48 39.78,30.48 40.69,31.39 55.47,31.39 IC5.26 | v29.57,44.5 28.96,45.11 28.35,45.11 X1.7
  Bottom 0.152: v35.97,30.48 35.97,30.94 29.57,37.34 v29.57,44.5
LTS+
  Top 0.152: K2.8 94.03,4.57 92.51,3.05 91.14,3.05 90.22,2.13 X4.1
LTS-
  Top 0.152: K2.5 92.66,4.57 92.66,5.64 90.22,8.08 X4.3
LVSEL
  Top 0.152: IC5.14 63.4,32 63.86,32 65.08,30.79 76.81,30.79 83.97,37.95 84.89,37.95 IC1.11
LWR  (via drill 0.38)
  Top 0.152: v59.13,31.24 61.42,28.96 63.25,28.96 IC5.9 | v29.57,46.18 29.11,46.63 28.35,46.63 X1.10
  Bottom 0.152: v59.13,31.24 59.59,31.24 61.11,32.77 62.94,32.77 65.53,35.36 65.53,35.66 60.66,40.54 34.59,40.54 31.24,43.89 31.24,52.12 30.33,53.03 28.96,53.03 25.15,49.23 25.15,47.55 26.82,45.87 29.26,45.87 v29.57,46.18
N$1  (via drill 0.38)
  Top 0.152: v116.59,30.48 118.72,32.61 122.68,32.61 123.6,33.53 123.6,45.87 120.85,48.62 120.85,49.23 R1.1 | v96.62,28.65 96.32,28.65 95.56,27.89 94.94,27.89 IC1.2
  Bottom 0.152: v116.59,30.48 116.59,28.35 114.61,26.36 98.91,26.36 v96.62,28.65
N$2  (via drill 0.38)
  Top 0.152: v116.43,50.14 116.43,52.73 117.04,53.34 121.16,53.34 121.92,54.1 R2.1 | v96.62,31.85 95.1,31.85 94.94,31.7 IC1.5
  Bottom 0.152: v116.43,50.14 116.43,49.68 115.21,48.46 113.23,48.46 v96.62,31.85
N$3  (via drill 0.38)
  Top 0.152: v114.61,50.75 115.82,51.97 115.82,52.58 115.06,53.34 115.06,54.86 118.26,58.06 122.53,58.06 123.29,58.83 R3.1 | v96.77,32.92 94.94,32.92 IC1.6
  Bottom 0.152: v96.77,32.92 v114.61,50.75
N$4  (via drill 0.38)
  Top 0.152: v111.1,58.52 115.52,62.94 122.22,62.94 122.99,63.7 R4.1 | v97.08,42.37 97.08,41.91 93.57,38.41 93.57,37.64 94.49,36.73 94.94,36.73 IC1.9
  Bottom 0.152: v111.1,58.52 101.35,48.77 100.13,48.77 97.08,45.72 v97.08,42.37
N$5
  Top 0.152: R5.1 109.73,42.22 108.2,42.22 105.77,44.65 104.09,44.65 103.48,45.26 103.48,46.63 102.87,47.24 101.65,47.24 100.28,45.87 97.08,45.87 87.94,36.73 84.89,36.73 IC1.12
N$6
  Top 0.152: 100.58,62.18 97.08,62.18 T1.1 | 100.58,62.18 105.46,62.18 SG1.- | 100.58,62.18 L3.2
N$7
  Top 0.152: R4.2 121.77,63.86 117.35,63.86 T6.2
N$8
  Top 0.152: T7.2 113.54,42.67 113.08,42.22 111.25,42.22 R5.2
N$9
  Top 0.152: D2.A U$1.2 U$1.4 123.44,29.72 125.27,27.89 125.27,17.37 124.51,16.61 124.51,7.92 U$3.P$1
N$10
  Top 0.152: R7.1 119.48,47.55 116.13,47.55 T3.1
N$11
  Top 0.152: R8.1 120.7,52.27 117.35,52.27 T4.1
N$12
  Top 0.152: R9.1 121.92,57 118.87,57 118.72,57.15 T5.1
N$13
  Top 0.152: R1.2 119.48,49.38 114.91,49.38 T3.2
N$14
  Top 0.152: R2.2 116.13,54.1 T4.2
N$15
  Top 0.152: R3.2 121.92,58.98 117.35,58.98 T5.2
N$16
  Top 0.152: R10.1 121.77,62.03 118.72,62.03 T6.1
N$17
  Top 0.152: IC7.7 120.4,40.08 120.4,43.13 R11.2 120.4,43.28 120.4,44.81 120.7,45.11 C1.2 120.85,45.26 120.85,47.4 R7.2 120.7,47.55 120.7,48.16 120.09,48.77 120.09,50.44 121.92,52.27 R8.2 122.07,52.43 122.07,52.88 123.29,54.1 123.29,56.84 R9.2 123.44,57 124.05,57.61 124.05,59.44 123.14,60.35 123.14,61.87 R10.2
N$18  (via drill 0.38)
  Top 0.152: 109.88,29.72 D2.C | 109.88,29.72 110.8,30.63 112.32,30.63 112.62,30.94 114.61,30.94 116.74,33.07 116.74,34.75 C5.1 | C6.1 113.84,34.9 116.74,34.9 C5.1 | IC7.1 119.18,34.75 116.89,34.75 C5.1 | C1.1 119.02,45.11 119.02,43.28 R11.1 118.87,43.13 118.87,41.3 118.72,41.15 v118.72,38.25 | 109.88,29.72 109.88,28.96 120.7,18.14 124.36,18.14 U$3.P$2
  Bottom 0.152: v118.72,38.25 118.72,23.77 U$3.P$2
N$19
  Top 0.152: D1.A 16,29.57 13.72,29.57 13.56,29.72 U$2.2 U$2.4 3.66,29.72 2.13,28.19 2.13,18.14 U$4.P$1
N$20  (via drill 0.38)
  Top 0.152: v15.85,43.28 15.85,45.87 15.09,46.63 15.09,55.63 13.87,56.84 R15.1 | v34.14,23.62 37.49,23.62 IC2.2
  Bottom 0.152: v15.85,43.28 18.44,40.69 18.44,39.32 v34.14,23.62
N$21
  Top 0.152: R13.2 107.44,29.72 108.66,30.94 112.17,30.94 113.23,32 U$1.1
N$22
  Top 0.152: R14.2 95.25,60.96 T1.2
N$23
  Top 0.152: S8.1 41.91,10.97 R35.1
N$24
  Top 0.152: R16.1 13.87,52.12 13.87,53.8 14.48,54.41 14.48,55.63 14.02,56.08 9.6,56.08 7.16,53.65 5.79,53.65 5.49,53.34 3.05,53.34 0.91,51.21 0.91,41.15 4.42,37.64 14.94,37.64 20.42,32.16 22.1,32.16 26.36,27.89 37.03,27.89 37.49,27.43 IC2.5
N$25  (via drill 0.38)
  Top 0.152: v15.09,44.96 15.09,46.18 14.17,47.09 14.17,47.4 R17.1 | v30.48,28.65 37.49,28.65 IC2.6
  Bottom 0.152: v15.09,44.96 18.75,41.3 18.75,39.47 29.57,28.65 v30.48,28.65
N$26
  Top 0.152: R18.1 13.87,42.82 15.09,41.6 15.09,39.47 18.59,35.97 23.47,35.97 26.36,33.07 29.41,33.07 30.02,32.46 37.49,32.46 IC2.9
N$27
  Top 0.152: R19.1 24.54,32.46 27.43,32.46 IC2.12
N$29
  Top 0.152: R15.2 12.5,57 8.69,57 T2.2
N$30
  Top 0.152: R16.2 12.5,52.12 8.99,52.12 8.69,52.43 T9.2
N$31
  Top 0.152: R17.2 12.8,47.55 9.3,47.55 8.99,47.85 T10.2
N$32
  Top 0.152: R18.2 11.89,43.43 10.52,42.06 T11.2
N$33  (via drill 0.38)
  Top 0.152: v23.77,31.39 23.32,31.85 23.32,32.46 R19.2
  Bottom 0.152: v23.77,31.39 16.15,31.39 13.26,34.29 10.67,34.29 T12.2
N$34
  Top 0.152: K3.1 26.67,14.63 30.33,10.97 40.39,10.97 R35.2 40.54,10.82 40.54,10.52 44.81,6.25 80.62,6.25 89,14.63 92.66,14.63 K2.1
N$35
  Top 0.152: R22.1 12.5,55.17 9.91,55.17 T2.1
N$36
  Top 0.152: R23.1 10.06,50.29 9.91,50.44 T9.1
N$37
  Top 0.152: R24.1 12.8,46.02 10.21,46.02 T10.1
N$38
  Top 0.152: R25.1 13.72,40.39 11.89,40.39 11.73,40.23 T11.1
N$39
  Top 0.152: 4.57,43.89 4.27,44.2 2.29,44.2 R26.2 | IC8.7 3.96,41.3 4.57,41.91 C2.2 4.57,43.89 | R25.2 13.72,42.37 13.26,42.82 13.26,44.2 | 13.26,44.2 13.26,45.11 14.02,45.87 R24.2 14.02,46.02 13.41,46.63 13.41,48.01 13.72,48.31 13.72,50.29 | 13.72,50.29 13.26,50.75 13.26,53.65 13.72,54.1 13.72,55.02 R22.2 | 13.72,50.29 R23.2 | 4.57,43.89 11.89,43.89 12.19,44.2 13.26,44.2
N$40  (via drill 0.38)
  Top 0.152: C8.1 21.03,31.24 18.9,31.24 C7.1 18.75,31.24 18.14,31.85 16,31.85 D1.C 16,32 12.95,35.05 12.95,36.58 12.19,37.34 1.98,37.34 | C2.1 4.57,45.72 2.29,45.72 R26.1 2.29,45.57 1.52,44.81 1.52,43.59 v1.98,43.13 | 1.98,37.34 1.98,36.73 2.59,36.12 IC8.1 | 1.98,37.34 v1.98,37.64
  Bottom 0.152: v1.98,43.13 v1.98,37.64 1.22,36.88 1.22,17.37 1.98,16.61 1.98,7.92 U$4.P$2
N$42  (via drill 0.38)
  Top 0.152: v51.51,17.68 58.83,17.68 63.09,21.95 65.99,21.95 R21.2
  Bottom 0.152: v51.51,17.68 24.23,17.68 14.48,27.43 U$2.1
N$45
  Top 0.152: IC7.4 122.99,34.75 122.99,35.36 120.85,37.49 117.96,37.49 114.15,41.3 113.54,41.3 T7.1
N$47
  Top 0.152: IC8.4 6.55,36.12 9.14,36.12 9.3,36.27 T12.1
RHVTRIG
  Top 0.152: R21.1 65.99,23.32 65.38,23.32 63.86,24.84 63.4,24.84 IC5.3
RTS+
  Top 0.152: K3.8 38.1,4.57 40.54,2.13 X5.1
RTS-
  Top 0.152: K3.5 32.92,4.57 35.81,7.47 39.93,7.47 40.54,8.08 X5.3
RVSEL
  Top 0.152: IC5.25 55.47,32.16 42.22,32.16 41.3,33.07 29.87,33.07 29.41,33.53 27.58,33.53 IC2.11
SCL  (via drill 0.38)
  Top 0.152: v61.27,31.39 63.25,31.39 IC5.13 | v52.12,29.57 49.07,26.52 49.07,19.51 44.5,14.94 44.5,8.53 45.26,7.77 46.18,7.77 X2.2 | v49.07,7.62 79.1,7.62 X3.2
  Bottom 0.152: v61.27,31.39 60.2,31.39 59.28,30.48 57.91,30.48 57.45,30.94 53.49,30.94 v52.12,29.57 | v49.07,7.62 48.31,6.86 47.09,6.86 46.33,7.62 X2.2
SDA
  Top 0.152: IC5.12 63.25,30.63 61.11,30.63 59.59,32.16 59.59,35.66 61.87,37.95 83.06,37.95 83.67,38.56 86.11,38.56 86.26,38.41 86.26,37.64 85.95,37.34 83.82,37.34 76.35,29.87 76.35,12.65 80.01,8.99 X3.3
  Bottom 0.152: X2.3 47.09,8.99 47.4,8.99 48.16,9.75 79.25,9.75 80.01,8.99 X3.3
SPKR  (via drill 0.38)
  Top 0.152: v104.55,49.68 102.87,51.36 101.96,51.36 101.65,51.66 101.65,52.88 98.6,55.93 95.25,55.93 R14.1 | v64.47,29.41 63.86,30.02 63.4,30.02 IC5.11
  Bottom 0.152: v104.55,49.68 104.55,46.94 85.5,27.89 65.99,27.89 v64.47,29.41
TCK  (via drill 0.38)
  Top 0.152: R32.1 102.56,50.44 102.56,48.01 104.85,45.72 C18.1 105,45.57 107.59,45.57 110.49,42.67 110.49,41.6 110.8,41.3 110.8,39.32 S5.2 | v5.03,59.59 4.72,59.59 4.12,58.98 2.59,58.98 TP4.TP | v54.41,25.6 55.47,25.6 IC5.35 | v97.08,30.94 87.02,30.94 86.72,31.24 86.26,31.24 85.95,30.94 78.94,30.94 77.11,29.11 v77.11,26.82
  Bottom 0.152: v5.03,59.59 8.69,59.59 19.66,48.62 19.66,44.5 39.47,24.69 52.73,24.69 53.65,25.6 v54.41,25.6 55.32,25.6 57.61,27.89 63.4,27.89 64.47,26.82 v77.11,26.82 | v97.08,30.94 100.74,30.94 108.97,39.17 110.8,39.17 S5.2
TDI  (via drill 0.38)
  Top 0.152: v1.98,55.02 1.98,60.5 2.44,60.96 2.44,61.42 TP2.TP | v58.83,21.95 58.98,21.79 58.98,20.42 R34.1 | IC5.37 55.47,24.23 54.41,24.23 52.58,22.4 S7.2 | v57.15,21.95 57,21.95 55.93,20.88 C20.1
  Bottom 0.152: v1.98,55.02 1.98,54.56 7.32,49.23 12.19,49.23 19.66,41.76 19.66,39.47 20.27,38.86 22.1,38.86 36.88,24.08 50.75,24.08 52.43,22.4 S7.2 52.58,22.25 52.88,21.95 v57.15,21.95 v58.83,21.95
TDO  (via drill 0.38)
  Top 0.152: 33.68,20.27 34.59,19.36 C21.1 | 33.68,20.27 31.09,22.86 26.36,22.86 26.21,22.71 26.21,21.79 26.52,21.49 26.52,19.66 R36.1 | v0.91,61.11 TP1.TP | v51.05,25.76 50.6,25.3 50.6,20.73 51.21,20.12 52.58,20.12 55.47,23.01 55.47,23.47 IC5.38 | v42.98,25.76 42.98,22.71 41.91,21.64 | 33.68,20.27 36.27,22.86 40.69,22.86 41.91,21.64 | 41.91,21.64 S8.3
  Bottom 0.152: v0.91,61.11 0.91,46.18 10.97,36.12 10.97,35.97 12.34,34.59 13.56,34.59 16,32.16 24.69,32.16 35.2,21.64 41.91,21.64 S8.3 | v42.98,25.76 v51.05,25.76
TEST  (via drill 0.38)
  Top 0.152: 3.96,56.39 TP6.TP | 3.96,56.39 4.72,57.15 R20.1 | v61.72,23.47 63.25,23.47 IC5.1 | v10.67,48.46 8.38,50.75 8.38,51.21 v6.71,52.88 | 3.96,56.39 v3.96,55.63
  Bottom 0.152: v61.72,23.47 56.69,18.44 49.84,18.44 49.38,17.98 47.55,17.98 41.76,23.77 36.27,23.77 21.49,38.56 20.12,38.56 19.05,39.62 19.05,41.91 12.5,48.46 v10.67,48.46 | v3.96,55.63 v6.71,52.88
TMS  (via drill 0.38)
  Top 0.152: R33.1 18.44,45.87 18.44,44.2 18.9,43.74 C19.1 19.05,43.59 19.05,42.37 20.57,40.84 S6.2 | v3.5,60.2 TP3.TP | v53.8,24.84 55.47,24.84 IC5.36
  Bottom 0.152: v3.5,60.2 7.62,56.08 7.77,56.08 8.99,54.86 8.99,53.49 20.57,41.91 20.57,40.84 S6.2 20.73,40.69 37.03,24.38 52.88,24.38 53.34,24.84 v53.8,24.84
VCC  (via drill 0.38)
  Top 0.152: L3.1 100.58,59.89 109.58,59.89 111.86,62.18 SG1.+ | C10.1 97.38,26.67 v97.08,26.36 | R6.2 45.41,11.43 45.41,8.99 X2.1 | v2.9,38.1 0.61,40.39 0.61,54.56 1.68,55.63 1.68,61.42 2.29,62.03 2.59,62.03 3.2,62.64 3.2,62.94 2.74,63.4 2.29,63.4 1.98,63.7 1.98,64.31 2.44,64.77 12.65,64.77 13.41,64.01 16.61,64.01 IC3.3
  Bottom 0.152: 97.08,26.06 97.08,17.98 K2.12 100.28,14.63 100.28,10.97 96.77,7.47 96.77,5.64 | 78.33,7.32 78.33,8.84 X3.1 | 78.33,7.32 80.01,5.64 96.77,5.64 | 96.77,5.64 100.28,2.13 K2.7 | 97.08,26.06 114.76,26.06 117.35,28.65 117.35,51.05 112.01,56.39 112.01,62.18 SG1.+ | 97.08,26.06 v97.08,26.36 | v2.9,38.1 2.9,35.97 23.16,15.7 33.38,15.7 34.29,14.78 K3.12 34.29,14.63 33.22,13.56 33.22,8.69 | K3.7 34.29,3.2 33.22,4.27 33.22,8.69 | 33.22,8.69 34.75,8.69 35.36,9.3 41,9.3 41.3,8.99 45.26,8.99 X2.1 45.26,8.84 45.26,7.47 46.18,6.55 48.92,6.55 49.68,7.32 78.33,7.32
XIN
  Top 0.152: IC5.6 63.4,26.98 65.99,26.98 Q3.2 66.14,27.13 66.14,29.72 C12.1
XOUT
  Top 0.152: IC5.5 63.4,26.21 65.23,26.21 65.99,25.45 Q3.1 66.14,25.45 66.29,25.6 68.58,25.6 C11.1
(copper drawn outside any net)
  shapes: Bottom area x1, Top area x1